# EAGLE board 7segment_shift (EAGLE 7.5.0)
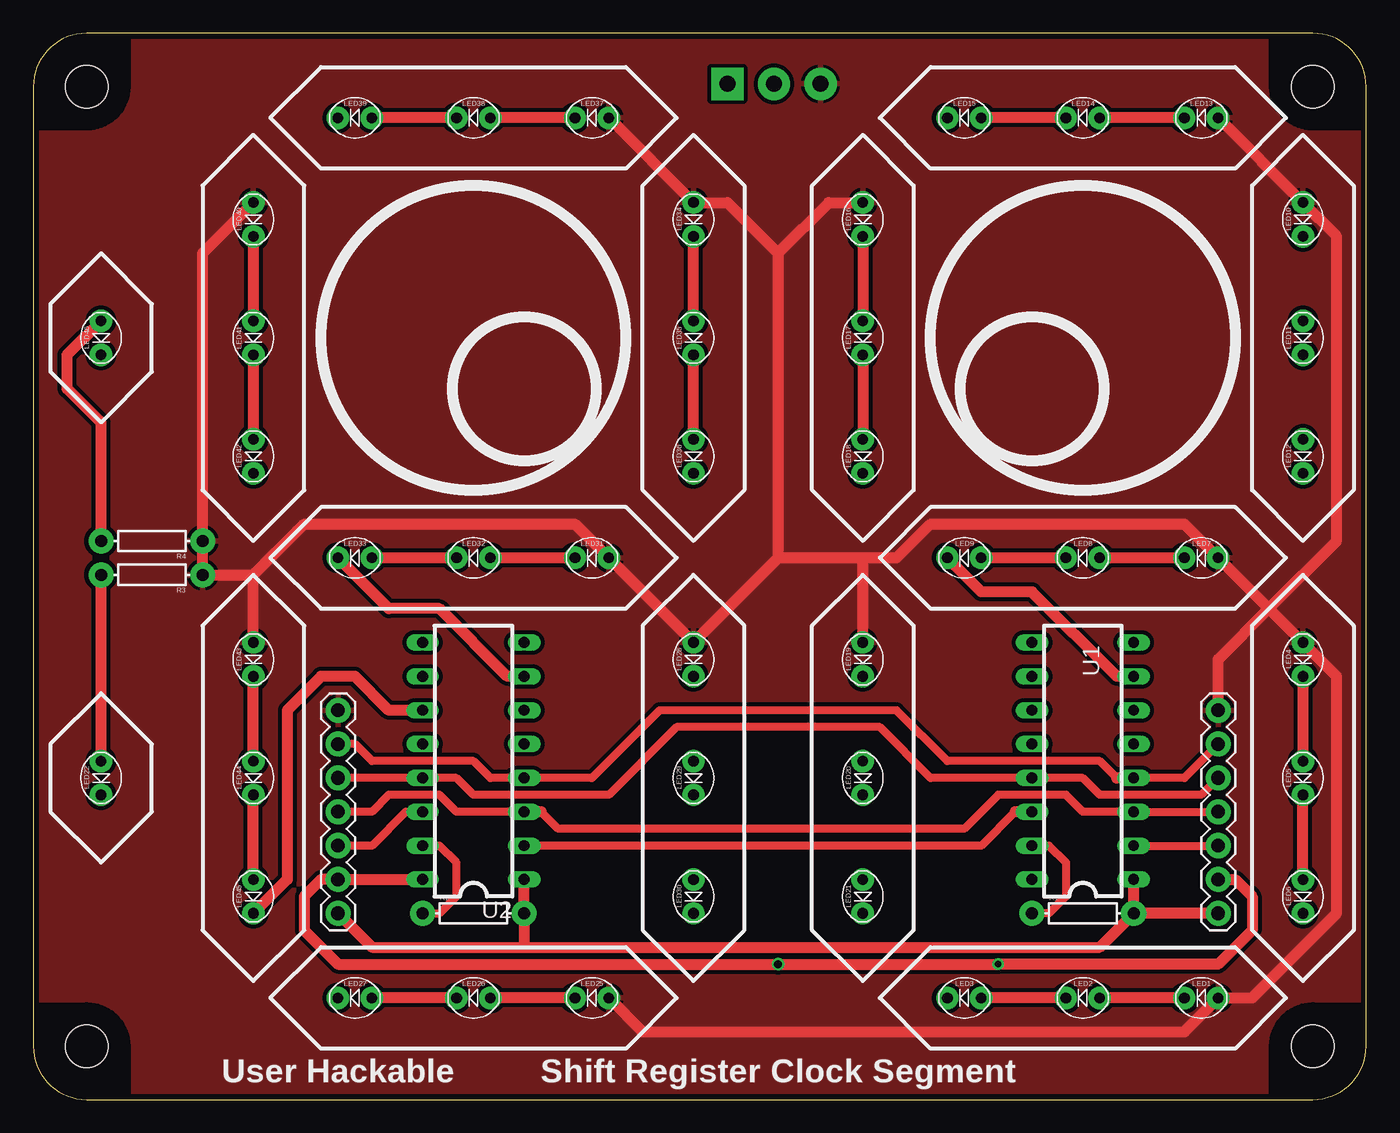
[diagram p0: board, top side]
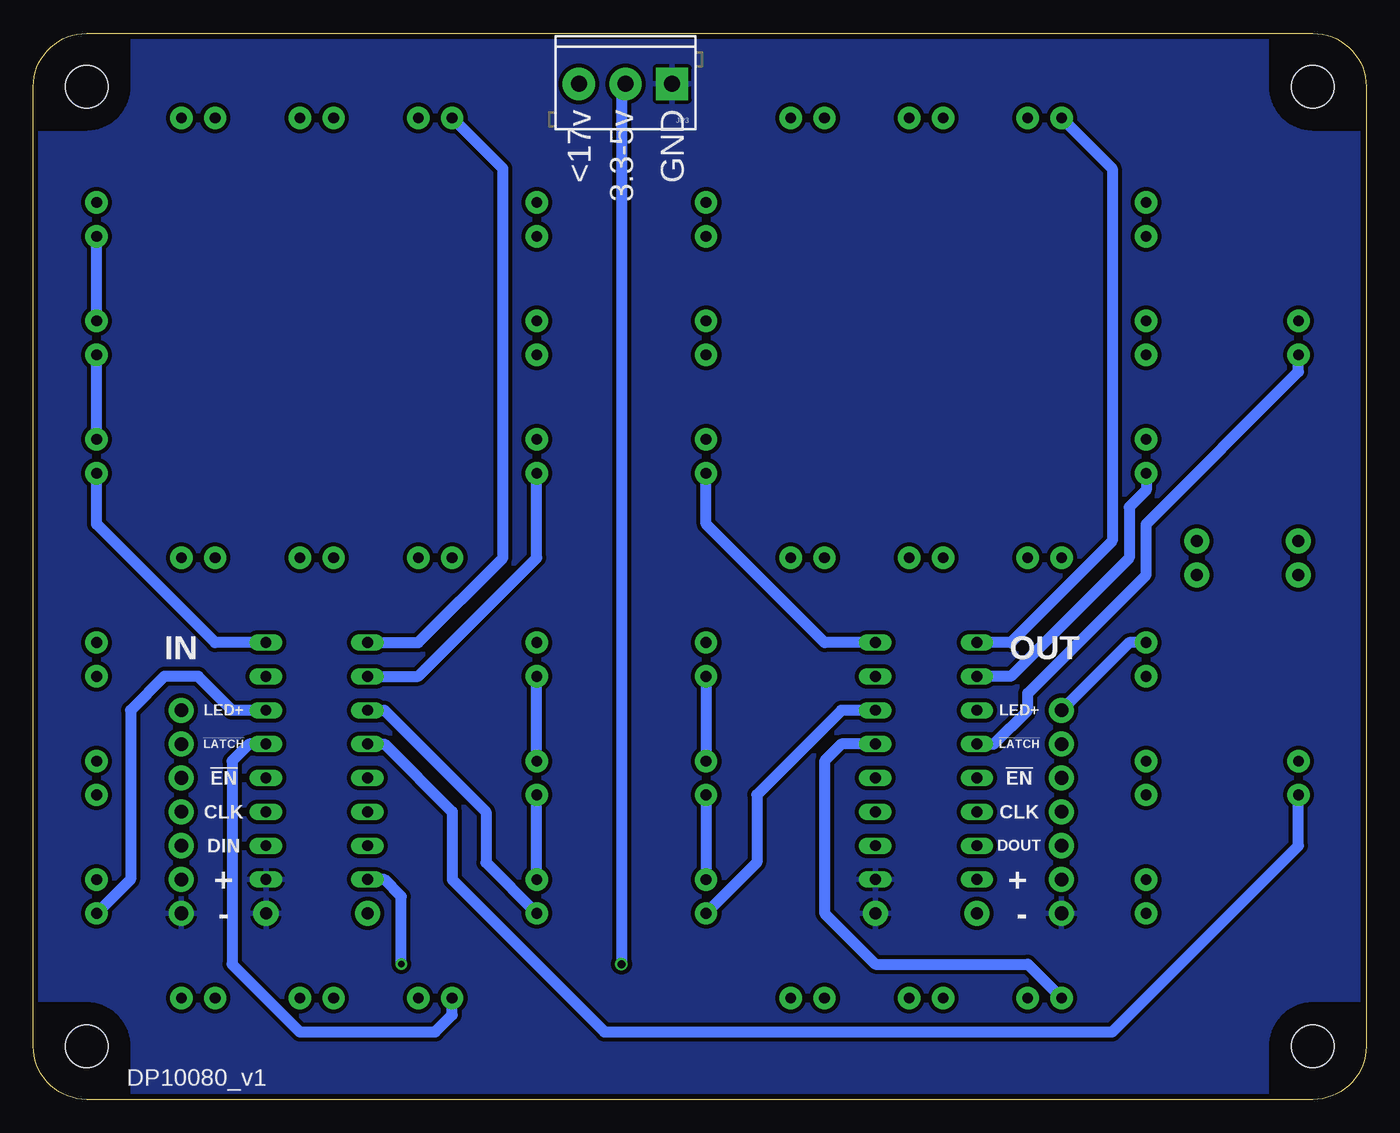
[diagram p1: board, bottom side, seen from below]

Size 100 x 80 mm. Coordinates in mm from the lower left corner, seen from the top.
Copper layers (1*16): Top 0.0356mm / dielectric 1.5011mm / Bottom 0.0356mm
Design rules "LaenPCBOrder": minimum track width 6mil, minimum drill 13mil, track to track 6mil, track to pad 6mil, pad to pad 6mil, via to via 6mil, smd to smd 6mil, copper to edge 15mil, drill to drill 6mil, minimum pad ring 7mil, minimum via ring 7mil, stop-mask expansion 3mil, vias tented up to drill 0mil, thermal gap 10mil

## Footprints (pad centres in the part's own frame; a part is rotated, then mirrored left to right if it is on the bottom)
1X07 = drill 1.016 pad 1.88: 1 0,0; 2 2.54,0; 3 5.08,0; 4 7.62,0; 5 10.16,0; 6 12.7,0; 7 15.24,0
SCREWTERMINAL-3.5MM-3 = drill 1.2 pad 2.413 square: 1 0,0 | drill 1.2 pad 2.413: 2 3.5,0; 3 7,0
LED-OVAL = drill 0.8 pad 1.676: ANODE 1.27,0; CATHODE -1.27,0
DP10080_V1 = hole 3.2: 4,4; 96,4; 96,76; 4,76
AXIAL-0.3 = drill 0.9 pad 1.88: P$1 -3.81,0; P$2 3.81,0
DIL16 = drill 0.813 long: 1 -8.89,-3.81; 2 -6.35,-3.81; 3 -3.81,-3.81; 4 -1.27,-3.81; 5 1.27,-3.81; 6 3.81,-3.81; 7 6.35,-3.81; 8 8.89,-3.81; 9 8.89,3.81; 10 6.35,3.81; 11 3.81,3.81; 12 1.27,3.81; 13 -1.27,3.81; 14 -3.81,3.81; 15 -6.35,3.81; 16 -8.89,3.81

## Placement (x,y rotation side)
JP1  [1X07]  88.9,13.97 90 top
JP2  [1X07]  22.86,13.97 90 top
JP3  [SCREWTERMINAL-3.5MM-3]  52.07,76.2 180 bottom
LED1  [LED-OVAL]  87.63,7.62 0 top
LED2  [LED-OVAL]  78.74,7.62 0 top
LED3  [LED-OVAL]  69.85,7.62 0 top
LED4  [LED-OVAL]  95.25,33.02 90 top
LED5  [LED-OVAL]  95.25,24.13 90 top
LED6  [LED-OVAL]  95.25,15.24 90 top
LED7  [LED-OVAL]  87.63,40.64 0 top
LED8  [LED-OVAL]  78.74,40.64 0 top
LED9  [LED-OVAL]  69.85,40.64 0 top
LED10  [LED-OVAL]  95.25,66.04 90 top
LED11  [LED-OVAL]  95.25,57.15 90 top
LED12  [LED-OVAL]  95.25,48.26 90 top
LED13  [LED-OVAL]  87.63,73.66 0 top
LED14  [LED-OVAL]  78.74,73.66 0 top
LED15  [LED-OVAL]  69.85,73.66 0 top
LED16  [LED-OVAL]  62.23,66.04 90 top
LED17  [LED-OVAL]  62.23,57.15 90 top
LED18  [LED-OVAL]  62.23,48.26 90 top
LED19  [LED-OVAL]  62.23,33.02 90 top
LED20  [LED-OVAL]  62.23,24.13 90 top
LED21  [LED-OVAL]  62.23,15.24 90 top
LED22  [LED-OVAL]  5.08,24.13 90 top
LED25  [LED-OVAL]  41.91,7.62 0 top
LED26  [LED-OVAL]  33.02,7.62 0 top
LED27  [LED-OVAL]  24.13,7.62 0 top
LED28  [LED-OVAL]  49.53,33.02 90 top
LED29  [LED-OVAL]  49.53,24.13 90 top
LED30  [LED-OVAL]  49.53,15.24 90 top
LED31  [LED-OVAL]  41.91,40.64 0 top
LED32  [LED-OVAL]  33.02,40.64 0 top
LED33  [LED-OVAL]  24.13,40.64 0 top
LED34  [LED-OVAL]  49.53,66.04 90 top
LED35  [LED-OVAL]  49.53,57.15 90 top
LED36  [LED-OVAL]  49.53,48.26 90 top
LED37  [LED-OVAL]  41.91,73.66 0 top
LED38  [LED-OVAL]  33.02,73.66 0 top
LED39  [LED-OVAL]  24.13,73.66 0 top
LED40  [LED-OVAL]  16.51,66.04 90 top
LED41  [LED-OVAL]  16.51,57.15 90 top
LED42  [LED-OVAL]  16.51,48.26 90 top
LED43  [LED-OVAL]  16.51,33.02 90 top
LED44  [LED-OVAL]  16.51,24.13 90 top
LED45  [LED-OVAL]  16.51,15.24 90 top
LED46  [LED-OVAL]  5.08,57.15 90 top
PCB1  PCB_DP_RECTANGLE-80X100  [DP10080_V1]  0,0 0 top
R1  [AXIAL-0.3]  78.74,13.97 0 top
R2  [AXIAL-0.3]  33.02,13.97 0 top
R3  [AXIAL-0.3]  8.89,39.37 180 top
R4  [AXIAL-0.3]  8.89,41.91 180 top
U1  DM115DIP16  [DIL16]  78.74,25.4 90 top
U2  DM115DIP16  [DIL16]  33.02,25.4 90 top

## Library data of the parts
JP1 JP2 = SparkFun-Connectors
JP3 = SparkFun-Connectors; PROD_ID: CONN-08288
LED1-LED22 LED25-LED46 R1-R4 = barbary_enterprises
PCB1 = dp_pcb
U1 U2 = siti

## Nets
!ENABLE: JP1.5 JP2.5 U1.13 U2.13
!LATCH: JP1.6 JP2.6 U1.4 U2.4
CLOCK: JP1.4 JP2.4 U1.3 U2.3
DATA: U1.14 U2.2
DIN: JP1.3 U1.2
DOUT: JP2.3 U2.14
GND: JP1.1 JP2.1 JP3.1 R1.P$2 R2.P$2 U1.1 U2.1
N$1: R1.P$1 U1.15
N$2: LED1.CATHODE LED2.ANODE
N$3: LED2.CATHODE LED3.ANODE
N$4: LED4.CATHODE LED5.ANODE
N$5: LED5.CATHODE LED6.ANODE
N$6: LED7.CATHODE LED8.ANODE
N$7: LED8.CATHODE LED9.ANODE
N$8: LED10.CATHODE LED11.ANODE
N$9: LED11.CATHODE LED12.ANODE
N$10: LED13.CATHODE LED14.ANODE
N$11: LED14.CATHODE LED15.ANODE
N$12: LED16.CATHODE LED17.ANODE
N$13: LED17.CATHODE LED18.ANODE
N$14: LED19.CATHODE LED20.ANODE
N$15: LED20.CATHODE LED21.ANODE
N$16: LED46.ANODE R4.P$2
N$18: R2.P$1 U2.15
N$19: LED25.CATHODE LED26.ANODE
N$20: LED26.CATHODE LED27.ANODE
N$21: LED28.CATHODE LED29.ANODE
N$22: LED29.CATHODE LED30.ANODE
N$23: LED31.CATHODE LED32.ANODE
N$24: LED32.CATHODE LED33.ANODE
N$25: LED34.CATHODE LED35.ANODE
N$26: LED35.CATHODE LED36.ANODE
N$27: LED37.CATHODE LED38.ANODE
N$28: LED38.CATHODE LED39.ANODE
N$29: LED40.CATHODE LED41.ANODE
N$30: LED41.CATHODE LED42.ANODE
N$31: LED43.CATHODE LED44.ANODE
N$32: LED44.CATHODE LED45.ANODE
N$34: LED22.ANODE R3.P$2
OUT0: LED3.CATHODE U1.5
OUT1: LED6.CATHODE U1.6
OUT2: LED9.CATHODE U1.7
OUT3: LED12.CATHODE U1.8
OUT4: LED15.CATHODE U1.9
OUT5: LED18.CATHODE U1.10
OUT6: LED21.CATHODE U1.11
OUT7: LED22.CATHODE U1.12
OUT8: LED27.CATHODE U2.5
OUT9: LED30.CATHODE U2.6
OUT10: LED33.CATHODE U2.7
OUT11: LED36.CATHODE U2.8
OUT12: LED39.CATHODE U2.9
OUT13: LED42.CATHODE U2.10
OUT14: LED45.CATHODE U2.11
OUT15: LED46.CATHODE U2.12
VDD: JP1.2 JP2.2 JP3.2 U1.16 U2.16
VLED: JP1.7 JP2.7 JP3.3 LED1.ANODE LED4.ANODE LED7.ANODE LED10.ANODE LED13.ANODE LED16.ANODE LED19.ANODE LED25.ANODE LED28.ANODE LED31.ANODE LED34.ANODE LED37.ANODE LED40.ANODE LED43.ANODE R3.P$1 R4.P$1

## Tracks (layer width: path | path; a pad name or v marks a point on that pad's centre or on a via)
!ENABLE
  Top 0.61: JP1.5 87.63,22.86 80.01,22.86 78.74,24.13 U1.13 67.31,24.13 63.5,27.94 48.26,27.94 43.18,22.86 33.02,22.86 31.75,24.13 U2.13 JP2.5
!LATCH
  Top 0.61: JP1.6 86.36,24.13 U1.4 | 81.28,24.13 80.01,25.4 68.58,25.4 64.77,29.21 46.99,29.21 41.91,24.13 U2.4 34.29,24.13 33.02,25.4 25.4,25.4 24.13,26.67 JP2.6
  Top 0.813: U1.4 81.28,24.13
CLOCK
  Top 0.61: JP1.4 U1.3 78.74,21.59 77.47,22.86 72.39,22.86 69.85,20.32 39.37,20.32 38.1,21.59 | U2.3 31.75,21.59 30.48,22.86 26.67,22.86 25.4,21.59 JP2.4
  Top 0.813: 38.1,21.59 U2.3
DATA
  Top 0.61: 73.66,21.59 71.12,19.05 U2.2
  Top 0.813: U1.14 73.66,21.59
DIN
  Top 0.61: U1.2 JP1.3
DOUT
  Top 0.61: U2.14 27.94,21.59 25.4,19.05 JP2.3
GND
  Top 0.813: JP1.1 R1.P$2 | R1.P$2 U1.1 | U2.1 R2.P$2 36.83,11.43 | JP2.1 25.4,11.43 36.83,11.43 | 36.83,11.43 80.01,11.43 R1.P$2
  pour Bottom (isolate 0.305): 0.64,0.64 99.69,0.64 99.69,79.38 0.64,79.38
N$1
  Top 0.61: U1.15 76.2,19.05 77.47,17.78 77.47,15.24 76.2,13.97 R1.P$1
N$2
  Top 0.813: LED1.CATHODE LED2.ANODE
N$3
  Top 0.813: LED2.CATHODE LED3.ANODE
N$4
  Top 0.813: LED4.CATHODE LED5.ANODE
N$5
  Top 0.813: LED6.ANODE LED5.CATHODE
N$6
  Top 0.813: LED7.CATHODE LED8.ANODE
N$7
  Top 0.813: LED8.CATHODE LED9.ANODE
N$8
  Bottom 0.813: LED11.ANODE LED10.CATHODE
N$9
  Bottom 0.813: LED12.ANODE LED11.CATHODE
N$10
  Top 0.813: LED13.CATHODE LED14.ANODE
N$11
  Top 0.813: LED14.CATHODE LED15.ANODE
N$12
  Top 0.813: LED16.CATHODE LED17.ANODE
N$13
  Top 0.813: LED17.CATHODE LED18.ANODE
N$14
  Bottom 0.813: LED20.ANODE LED19.CATHODE
N$15
  Bottom 0.813: LED21.ANODE LED20.CATHODE
N$16
  Top 0.813: R4.P$2 5.08,50.8 2.54,53.34 2.54,55.88 LED46.ANODE
N$18
  Top 0.61: R2.P$1 30.48,13.97 31.75,15.24 31.75,17.78 30.48,19.05 U2.15
N$19
  Top 0.813: LED25.CATHODE LED26.ANODE
N$20
  Top 0.813: LED26.CATHODE LED27.ANODE
N$21
  Bottom 0.813: LED28.CATHODE LED29.ANODE
N$22
  Bottom 0.813: LED29.CATHODE LED30.ANODE
N$23
  Top 0.813: LED31.CATHODE LED32.ANODE
N$24
  Top 0.813: LED32.CATHODE LED33.ANODE
N$25
  Top 0.813: LED35.ANODE LED34.CATHODE
N$26
  Top 0.813: LED36.ANODE LED35.CATHODE
N$27
  Top 0.813: LED37.CATHODE LED38.ANODE
N$28
  Top 0.813: LED38.CATHODE LED39.ANODE
N$29
  Top 0.813: LED40.CATHODE LED41.ANODE
N$30
  Top 0.813: LED41.CATHODE LED42.ANODE
N$31
  Top 0.813: LED44.ANODE LED43.CATHODE
N$32
  Top 0.813: LED45.ANODE LED44.CATHODE
N$34
  Top 0.813: LED22.ANODE R3.P$2
OUT0
  Bottom 0.813: U1.5 83.82,26.67 85.09,25.4 85.09,10.16 80.01,5.08 69.85,5.08 68.58,6.35 LED3.CATHODE
OUT1
  Bottom 0.813: U1.6 85.09,29.21 87.63,31.75 90.17,31.75 92.71,29.21 92.71,16.51 LED6.CATHODE
OUT2
  Top 0.813: U1.7 81.28,31.75 74.93,38.1 71.12,38.1 LED9.CATHODE
OUT3
  Bottom 0.813: U1.8 86.36,34.29 95.25,43.18 LED12.CATHODE
OUT4
  Bottom 0.813: U1.9 71.12,34.29 64.77,40.64 64.77,69.85 LED15.CATHODE
OUT5
  Bottom 0.813: U1.10 71.12,31.75 62.23,40.64 LED18.CATHODE
OUT6
  Bottom 0.813: U1.11 73.66,29.21 66.04,21.59 66.04,17.78 LED21.CATHODE
OUT7
  Bottom 0.813: U1.12 73.66,26.67 68.58,21.59 68.58,16.51 57.15,5.08 19.05,5.08 5.08,19.05 LED22.CATHODE
OUT8
  Bottom 0.813: U2.5 39.37,26.67 40.64,25.4 40.64,13.97 36.83,10.16 25.4,10.16 LED27.CATHODE
OUT9
  Bottom 0.813: U2.6 39.37,29.21 45.72,22.86 45.72,17.78 LED30.CATHODE
OUT10
  Top 0.813: U2.7 35.56,31.75 30.48,36.83 26.67,36.83 LED33.CATHODE
OUT11
  Bottom 0.813: U2.8 40.64,34.29 49.53,43.18 LED36.CATHODE
OUT12
  Bottom 0.813: LED39.CATHODE 19.05,69.85 19.05,41.91 26.67,34.29 U2.9
OUT13
  Bottom 0.813: LED42.CATHODE 16.51,45.72 17.78,44.45 17.78,40.64 26.67,31.75 U2.10
OUT14
  Top 0.813: U2.11 26.67,29.21 24.13,31.75 21.59,31.75 19.05,29.21 19.05,16.51 LED45.CATHODE
OUT15
  Bottom 0.813: U2.12 27.94,26.67 25.4,29.21 25.4,30.48 16.51,39.37 16.51,43.18 5.08,54.61 LED46.CATHODE
VDD  (via drill 0.51, 0.6)
  Top 0.813: JP1.2 90.17,16.51 91.44,15.24 91.44,12.7 88.9,10.16 v72.39,10.16 v55.88,10.16 22.86,10.16 20.32,12.7 20.32,15.24 21.59,16.51 JP2.2 U2.16
  Bottom 0.813: v72.39,10.16 72.39,15.24 73.66,16.51 U1.16 | JP3.2 55.57,75.88 55.88,75.56 v55.88,10.16
VLED
  Top 0.813: 92.71,36.83 LED4.ANODE 97.79,31.75 97.79,13.97 91.44,7.62 LED1.ANODE 86.36,5.08 45.72,5.08 LED25.ANODE | 92.71,36.83 LED7.ANODE 86.36,43.18 67.31,43.18 64.77,40.64 62.23,40.64 | LED13.ANODE LED10.ANODE 97.79,64.77 97.79,41.91 92.71,36.83 | JP1.7 88.9,33.02 92.71,36.83 | LED37.ANODE LED34.ANODE 52.07,67.31 55.88,63.5 | LED40.ANODE 12.7,63.5 R4.P$1 R3.P$1 16.51,39.37 | LED43.ANODE 16.51,39.37 | 16.51,39.37 20.32,43.18 40.64,43.18 LED31.ANODE LED28.ANODE 55.88,40.64 | 55.88,63.5 55.88,40.64 | 55.88,63.5 59.69,67.31 LED16.ANODE | 62.23,40.64 55.88,40.64 | LED19.ANODE 62.23,40.64
  Bottom 0.813: LED43.ANODE 17.78,34.29 JP2.7
  pour Top (isolate 0.305): 0.64,0.64 99.69,0.64 99.69,79.38 0.64,79.38

## Text on the board
tPlace: User Hackable | Shift Register Clock Segment
bPlace: GND | 3.3-5v | <17v | OUT | IN | LED+ | LED+ | !LATCH | !LATCH | !EN | !EN | CLK | CLK | DOUT | DIN | + | + | - | -